# Altium PCB PCB2.PcbDoc
Units mil, origin at the board's own origin, x right, y up, seen from the top; angles counter-clockwise.
Board outline 2500 x 1000 mil, 4 copper layers (1+, 1-, 2-, 2+), stack 382.048 mil thick; 8 components, 4 nets, 24 pads, 0 vias.
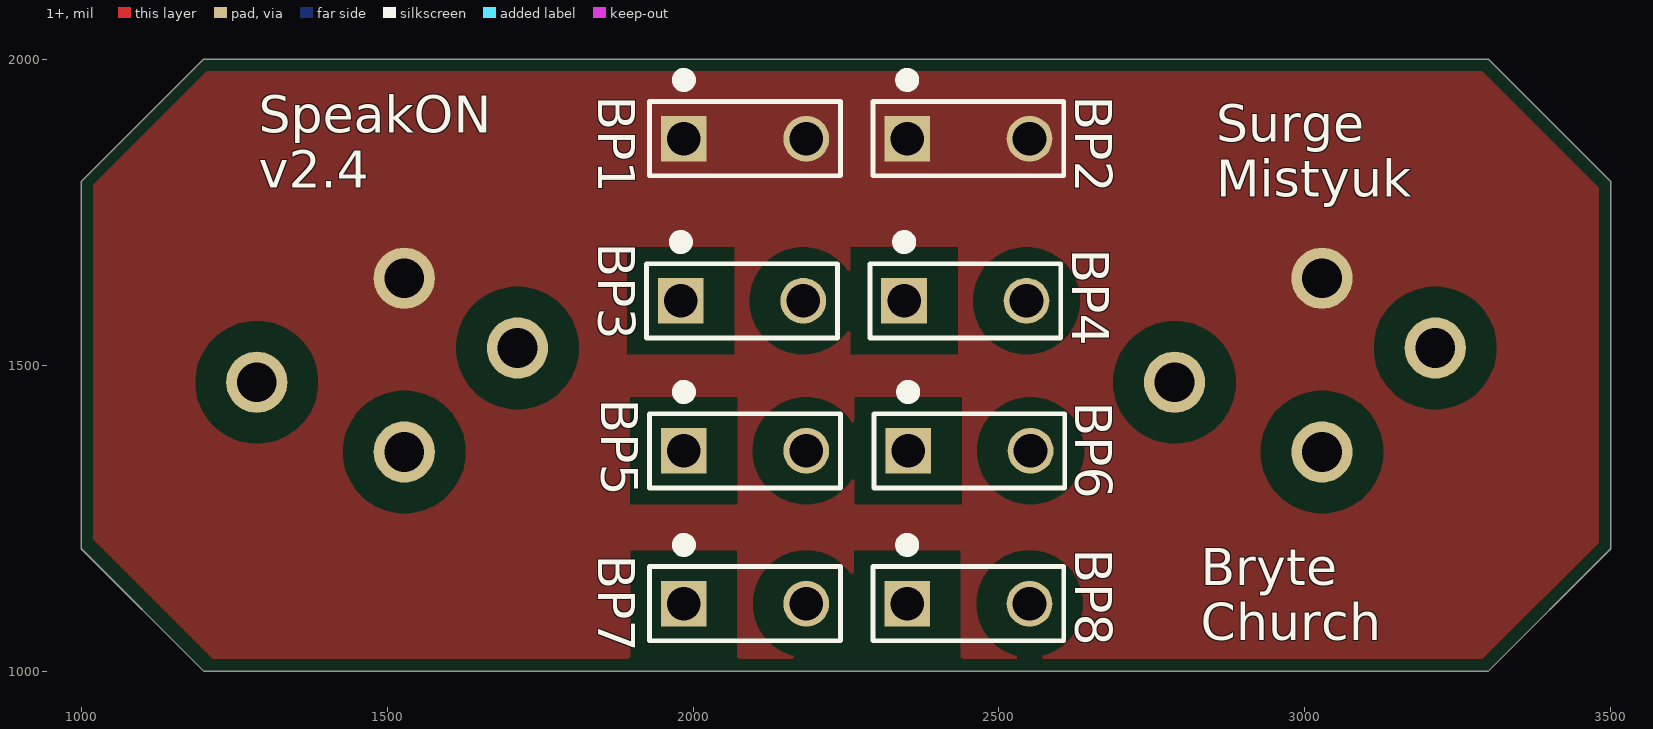
[diagram p0: 1+ view]
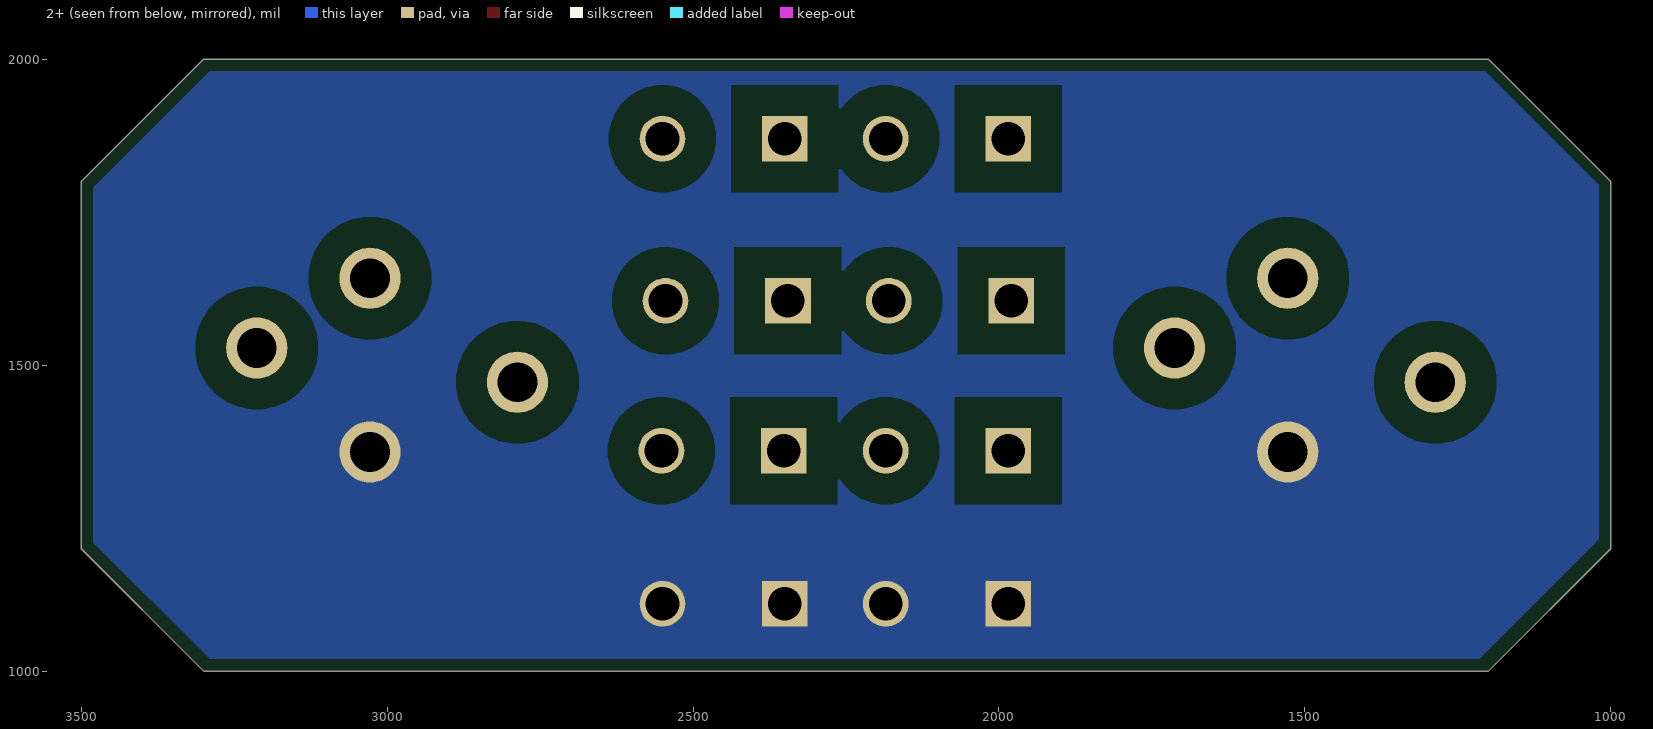
[diagram p1: 2+ view, seen from below]
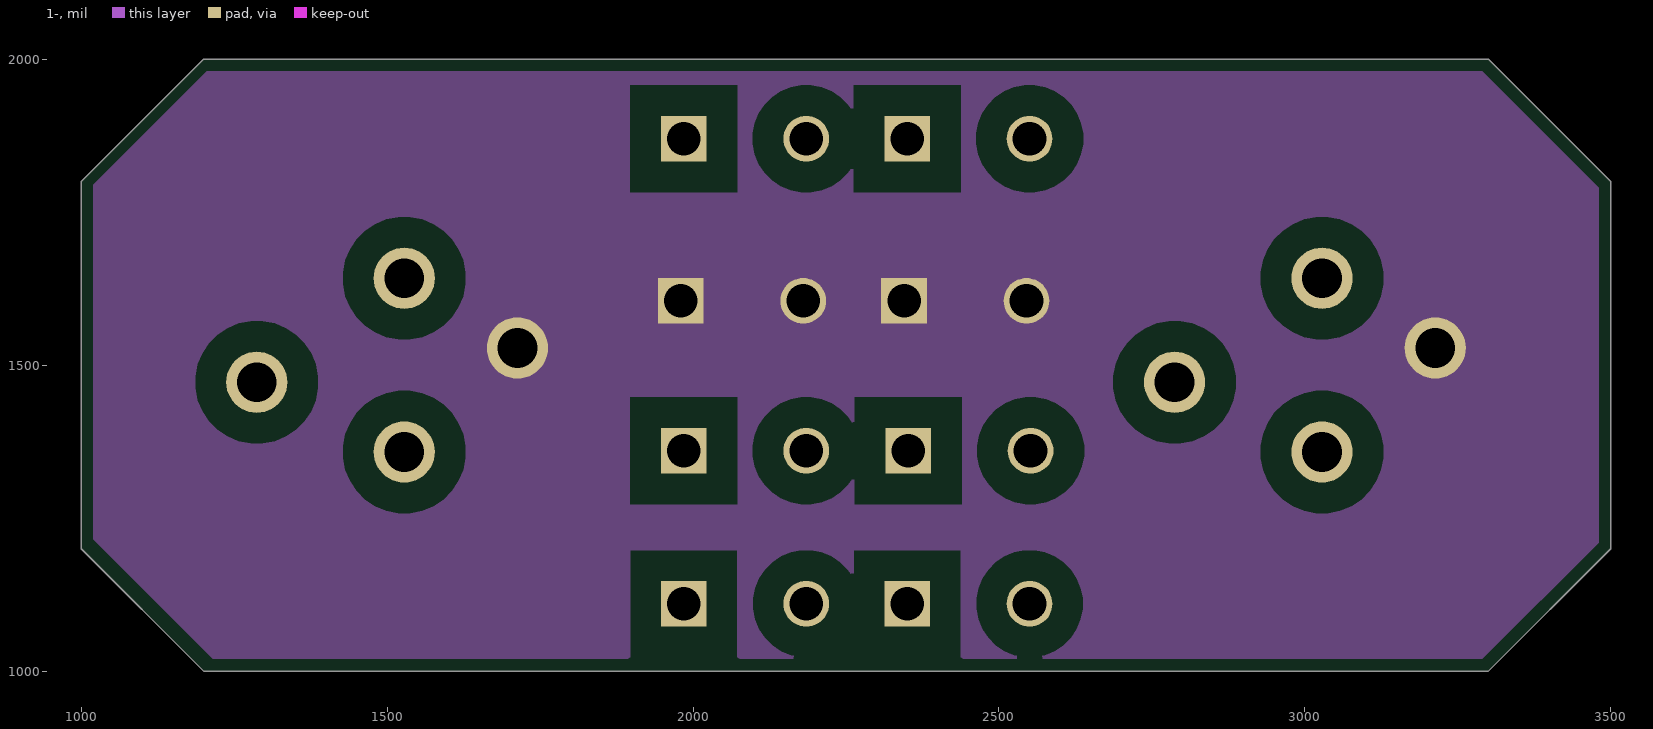
[diagram p2: 1-]
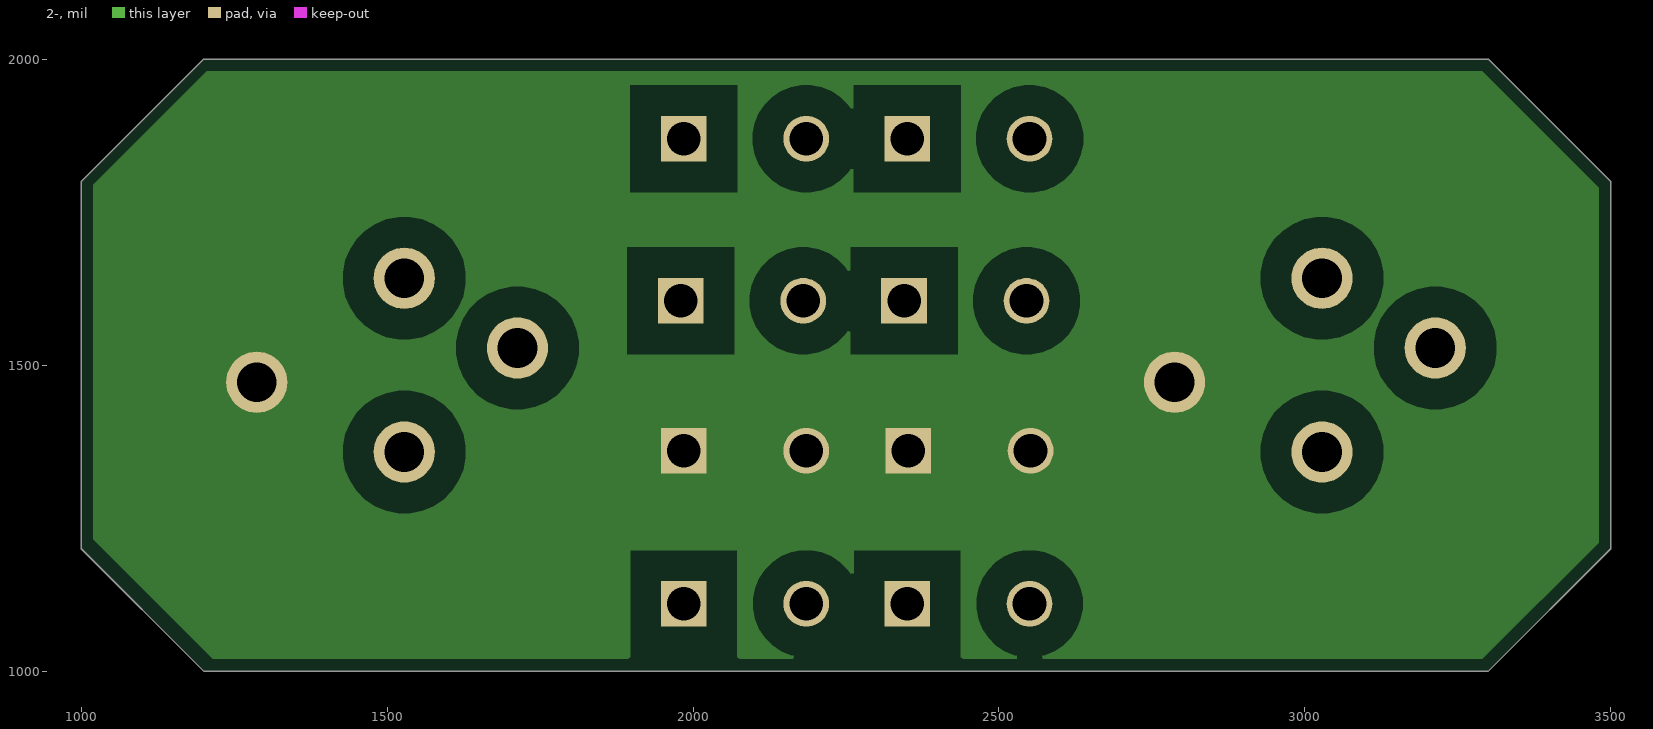
[diagram p3: 2-]
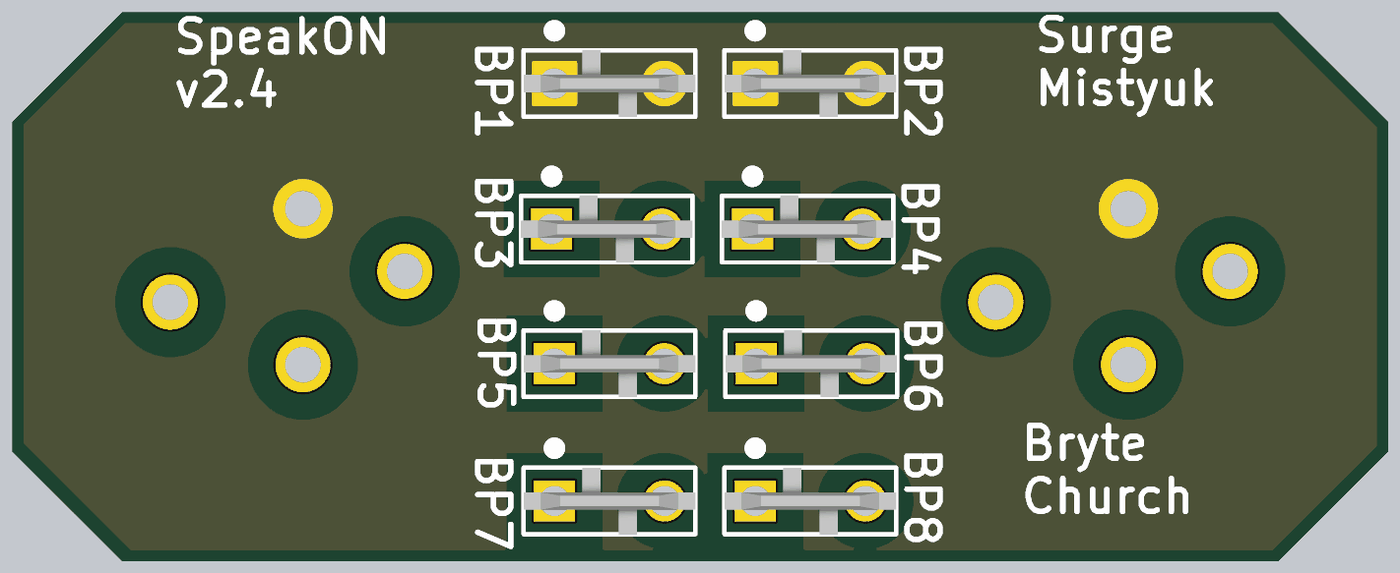
[diagram p4: 3D render of the assembled board from above, using the file's embedded part models]

## Layer stack, top to bottom
Top Solder: solder mask 0.4, Solder Resist, Dk 3.5
1+: signal copper 5.512
Dielectric 2: prepreg 120, PP-006, Dk 4.1
1-: signal copper 5.512
Dielectric 1: dielectric 120, FR-4, Dk 4.8
2-: signal copper 5.512
Dielectric 3: prepreg 120, PP-006, Dk 4.1
2+: signal copper 5.512
Bottom Solder: solder mask 0.4, Solder Resist, Dk 3.5

## Board outline
3300,1000 3500,1200 3500,1800 3300,2000 1200,2000 1000,1800 1000,1200 1200,1000

## Design rules (kind name [scope] priority, off if disabled: settings)
Clearance [All] p1: gap=50 ignorepadtopadclearanceinfootprint=FALSE
ComponentClearance [All] p1: gap=40 collisioncheckmode=3 verticalgap=10 showdistances=FALSE
PlaneConnect [All] p1: planeconnectstyle=Direct reliefexpansion=20 reliefentries=4 reliefconductorwidth=150 reliefairgap=10
PolygonConnect [All] p1: connectstyle=Direct reliefconductorwidth=25 reliefentries=4 polygonreliefangle="90 Angle" airgapwidth=10
RoutingVias [All] p1: holewidth=28 width=50 viastyle="Through Hole" minholewidth=28 minwidth=50 maxholewidth=28 maxwidth=50
SolderMaskExpansion [All] p1: expansion=4 istentingtop=FALSE
Width [All] p1: maxlimit=10 minlimit=10 preferedwidth=10
28 further rules are at their usual default settings.

## Components (designator, comment, footprint, x,y, rotation, side; value= is the part's Value field where it differs from the comment)
BP1 "63824-1" TECO-63824-1_V 2085,1870 r0 top
BP2 "63824-1" TECO-63824-1_V 2450,1870 r0 top
BP3 "63824-1" TECO-63824-1_V 2080,1605 r0 top
BP4 "63824-1" TECO-63824-1_V 2445,1605 r0 top
BP5 "63824-1" TECO-63824-1_V 2085,1360 r0 top
BP6 "63824-1" TECO-63824-1_V 2451.66,1360 r0 top
BP7 "63824-1" TECO-63824-1_V 2085,1110 r0 top
BP8 "63824-1" TECO-63824-1_V 2450,1110 r0 top

## Footprints (in the part's own frame and the unit in brackets; to place one, negate y for a bottom-side part, rotate by r counter-clockwise, add the part's x,y. Pads: shape width x height; smd on the part's side, far side on the other; paste and mask are expansions set on the pad)
TECO-63824-1_V [mm] "THD, 2-Leads, Body 7.92x3.08mm, Pitch 5.08mm"
  rect 1.9x1.9 hole 1.4: 1(-2.54,0)
  round 1.9 hole 1.4: 2(2.54,0)
  silkscreen extent -3.96,-1.54 3.96,2.69, body extent -3.96,-1.55 3.96,1.54, height 10.21

## Part data
BP1 BP2 BP3 BP4 BP5 BP6 BP7 BP8: library part CMP-1684-00002-4, "Printed Circuit Board Terminal and Disconnect, 2-Pin THD, RoHS, Tape and Reel", Colour=Silver, Manufacturer="TE Connectivity", Package Quantity=10000, ComponentLink1Description="Manufacturer URL", ComponentLink1URL=http://www.te.com/, ComponentLink2Description=Datasheet, ComponentLink2URL=http://www.te.com/commerce/DocumentDelivery/DDEController?Action=showdoc&DocId=Customer+Drawing%7F63824%7FR%7Fpdf%7FEnglish%7FENG_CD_63824_R_baseFilename.pdf%7F63824-1, Contact Material=Brass, Contact Plating=Tin, DatasheetVersion="Rev. R, 06/2013", Length="13.63 mm", Mounting Technology="Through Hole", PackageDescription="2-Pin Through Hole Device, Body 7.92 x 3.08 mm, Pitch 5.08 mm", PackageReference=63824-1, Packaging="Tape and Reel", REACH SVHC=Unknown, RoHSCompliant=True

## Free pads (board coordinates)
  round 100 hole 65: 21(1287,1472) 21(1528,1358) 21(1528,1642) 21(1713,1528) 21(2787,1472) 21(3028,1358) 21(3028,1642) 21(3213,1528)

## Nets (pads, with @x,y where several pads share a name; then routed paths per layer and width w, separated by ;. In a path a pad name is that pad's centre, name@x,y a point inside that pad or via, vN(x,y) a via of type N, cw(c..) or ccw(c..) an arc to the next point about the centre after c; other vN are vias at no path point)
1+: BP1.1 BP1.2 BP2.1 BP2.2 pad.21@1528,1642 pad.21@3028,1642
1-: BP3.1 BP3.2 BP4.1 BP4.2 pad.21@1713,1528 pad.21@3213,1528
2+: BP7.1 BP7.2 BP8.1 BP8.2 pad.21@1528,1358 pad.21@3028,1358
2-: BP5.1 BP5.2 BP6.1 BP6.2 pad.21@1287,1472 pad.21@2787,1472

## Polygon pours and split planes (outlines as drawn)
1- on 1- "1-_L02_P000" (solid, pour order 0): 1205,1980 1020,1795 1020,1215 1215,1020 3290,1020 3480,1210 3480,1790 3290,1980
2- on 2- "2-_L03_P004" (solid, pour order 4): 1205,1980 1020,1795 1020,1215 1215,1020 3290,1020 3480,1210 3480,1790 3290,1980
2+ on 2+ "2+_L04_P005" (solid, pour order 5): 1205,1980 1020,1795 1020,1215 1215,1020 3290,1020 3480,1210 3480,1790 3290,1980
1+ on 1+ "1+_L01_P006" (solid, pour order 6): 1205,1980 1020,1795 1020,1215 1215,1020 3290,1020 3480,1210 3480,1790 3290,1980

## Silkscreen, mask and mechanical layers (free items; w line width, h text height)
Top Overlay:
  text "SpeakON  / v2.4" at 1290,1790 h60
  text "Surge / Mistyuk" at 2855,1775 h60
  text "Bryte / Church" at 2830,1050 h60
Mechanical 1:
  lines w0: 1000,1200 1200,1000 ; 1000,1200 1000,1800 ; 1000,1200 1200,1000 ; 1000,1200 1000,1800 ; 1000,1800 1200,2000 ; 1000,1800 1200,2000 ; 1200,1000 3300,1000 ; 1200,1000 3300,1000 ; 1200,2000 3300,2000 ; 1200,2000 3300,2000 ; 3300,1000 3500,1200 ; 3300,1000 3500,1200 ; 3300,2000 3500,1800 ; 3300,2000 3500,1800 ; 3500,1200 3500,1800 ; 3500,1200 3500,1800